# Altium PCB PCB_TEST_ADAPTER.PcbDoc (part 1 of 2)
Units mil, origin at the board's own origin, x right, y up, seen from the top; angles counter-clockwise.
Board outline 9448.82 x 5511.81 mil, 4 copper layers (Top Layer, Internal Plane 1, Internal Plane 2, Bottom Layer), stack 30.635 mil thick; 309 components, 242 nets, 1237 pads, 252 vias.
Unrouted connection lines stored in the file: 662.
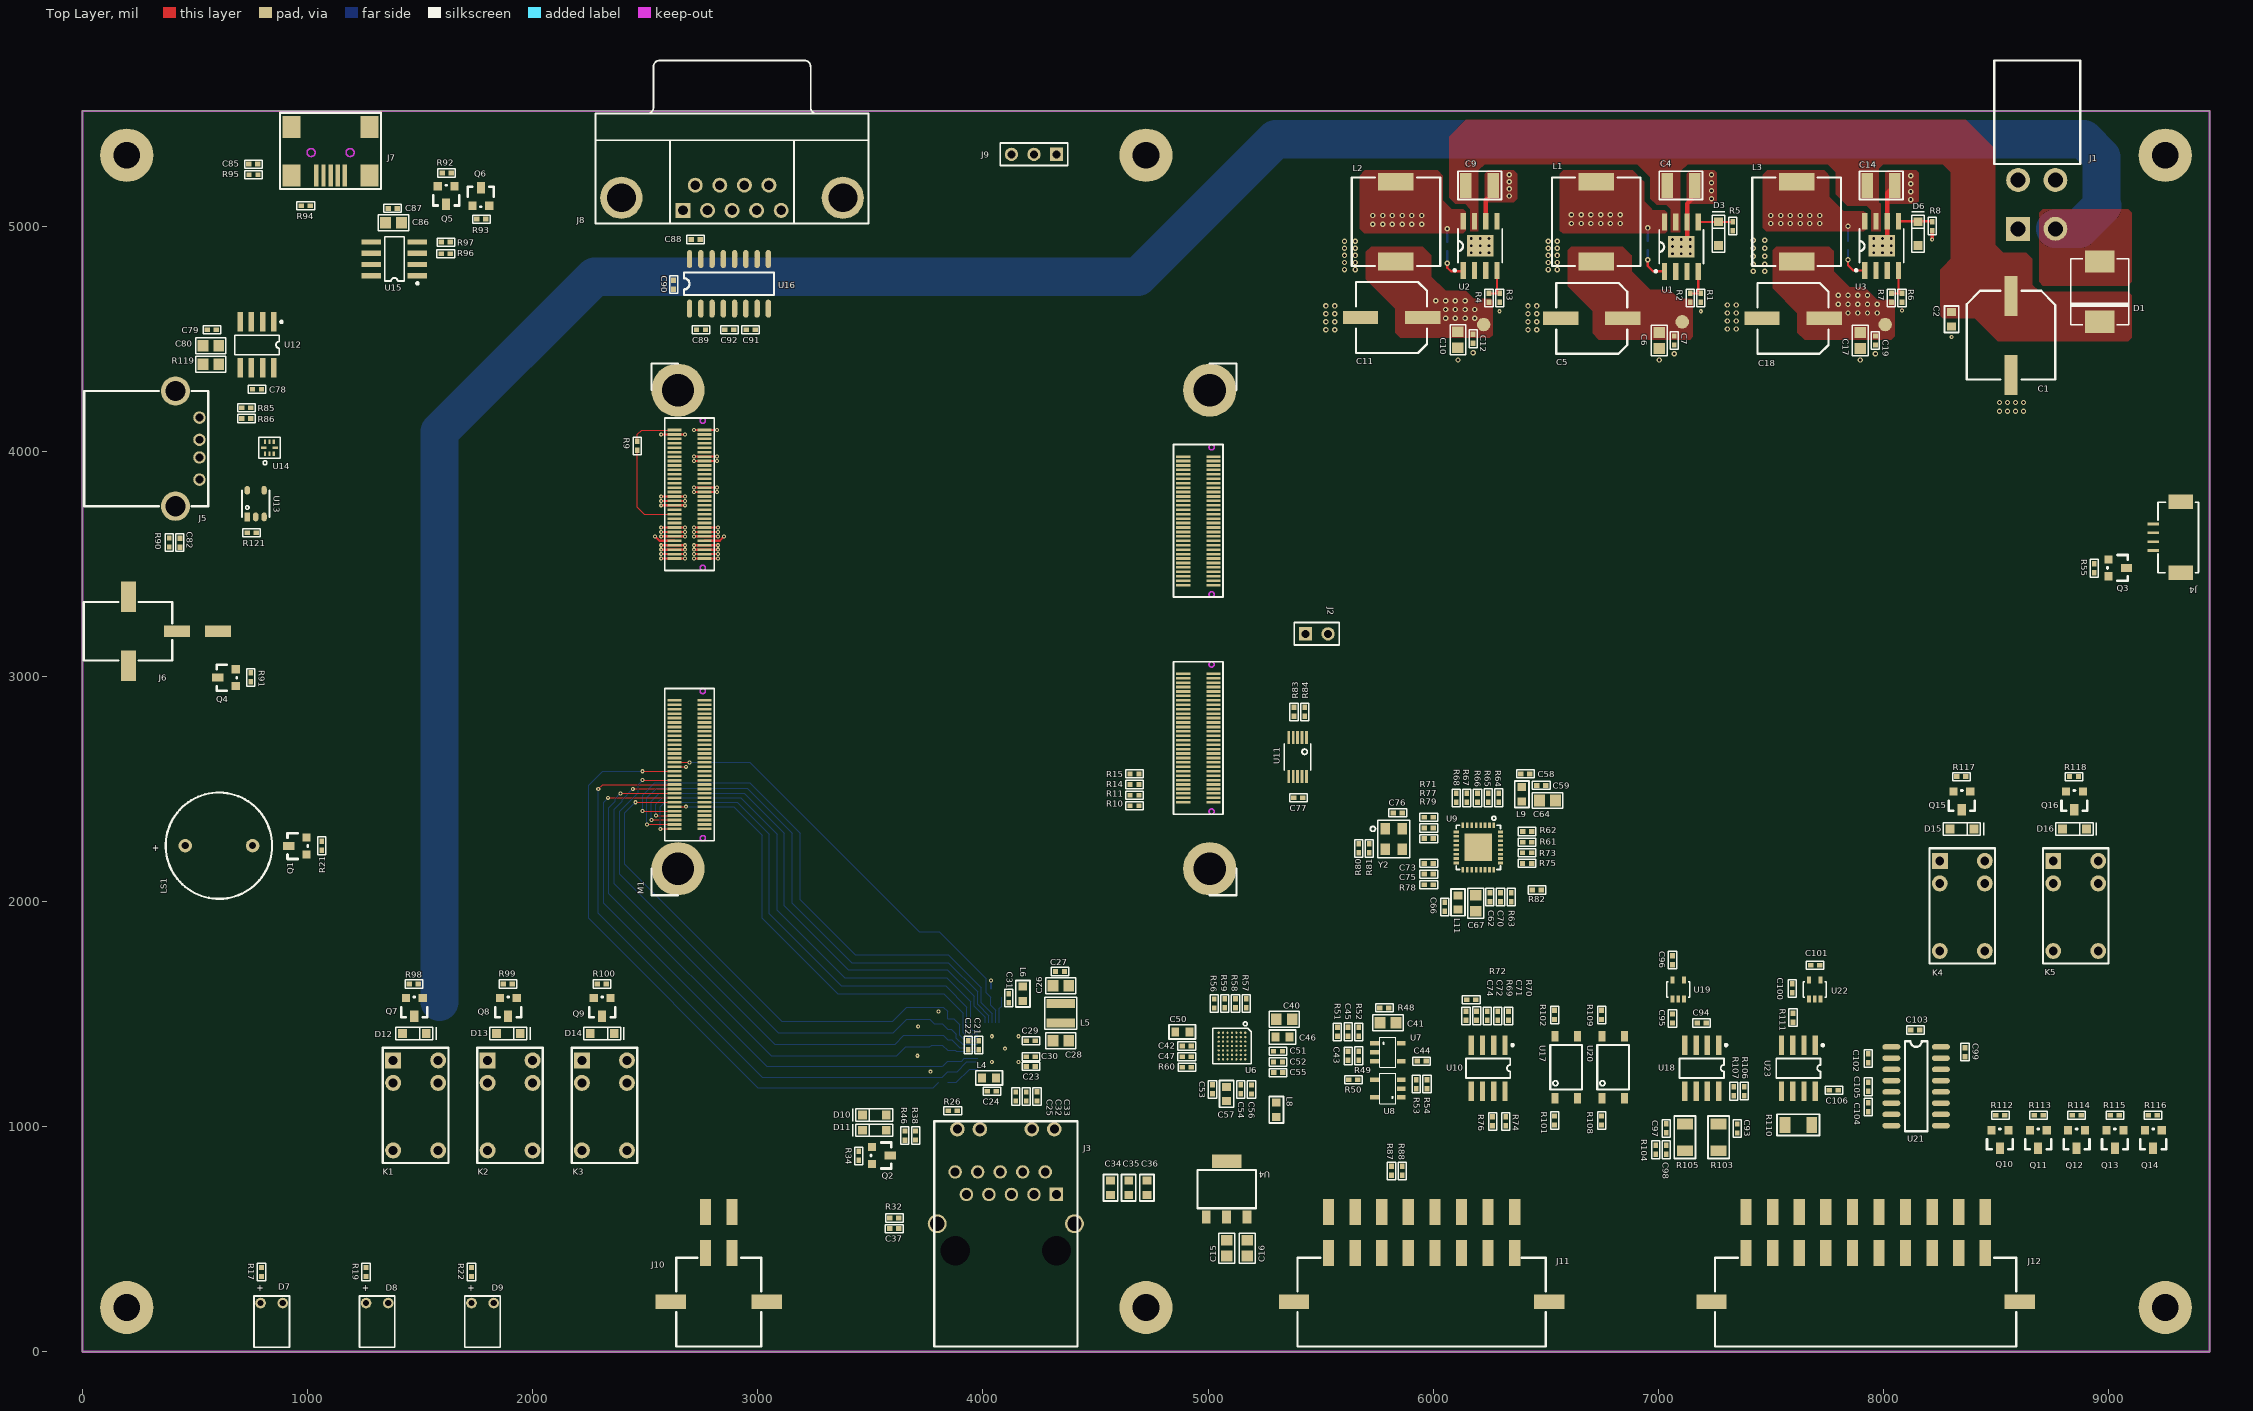
[diagram p0: Top Layer view]
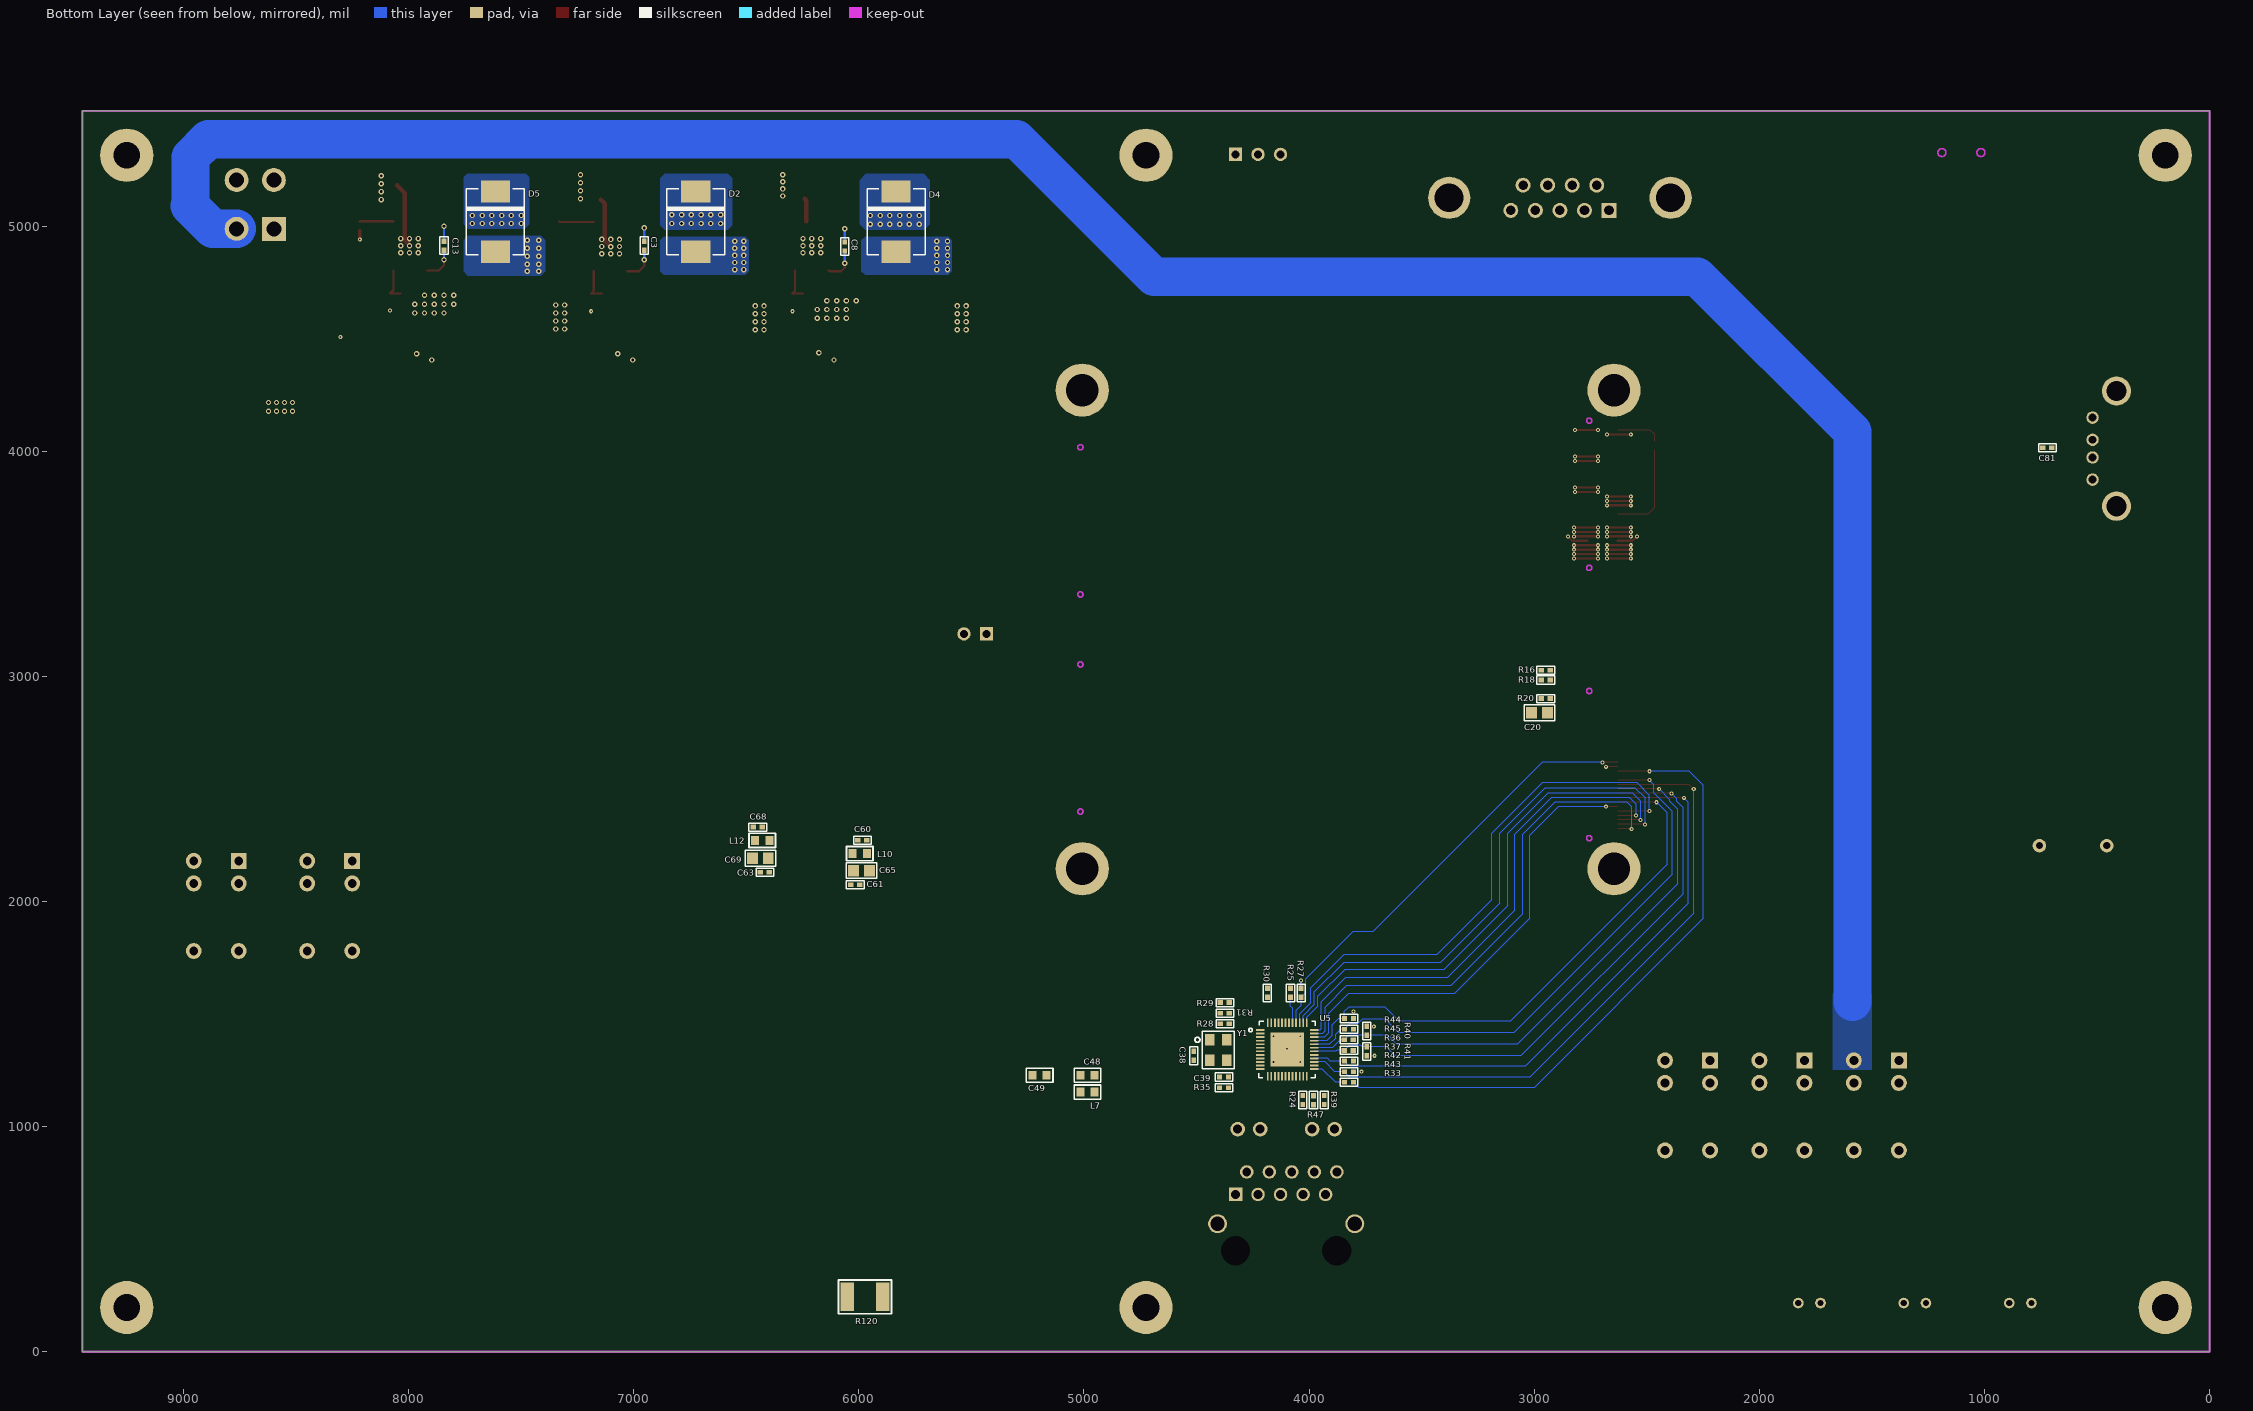
[diagram p1: Bottom Layer view, seen from below]
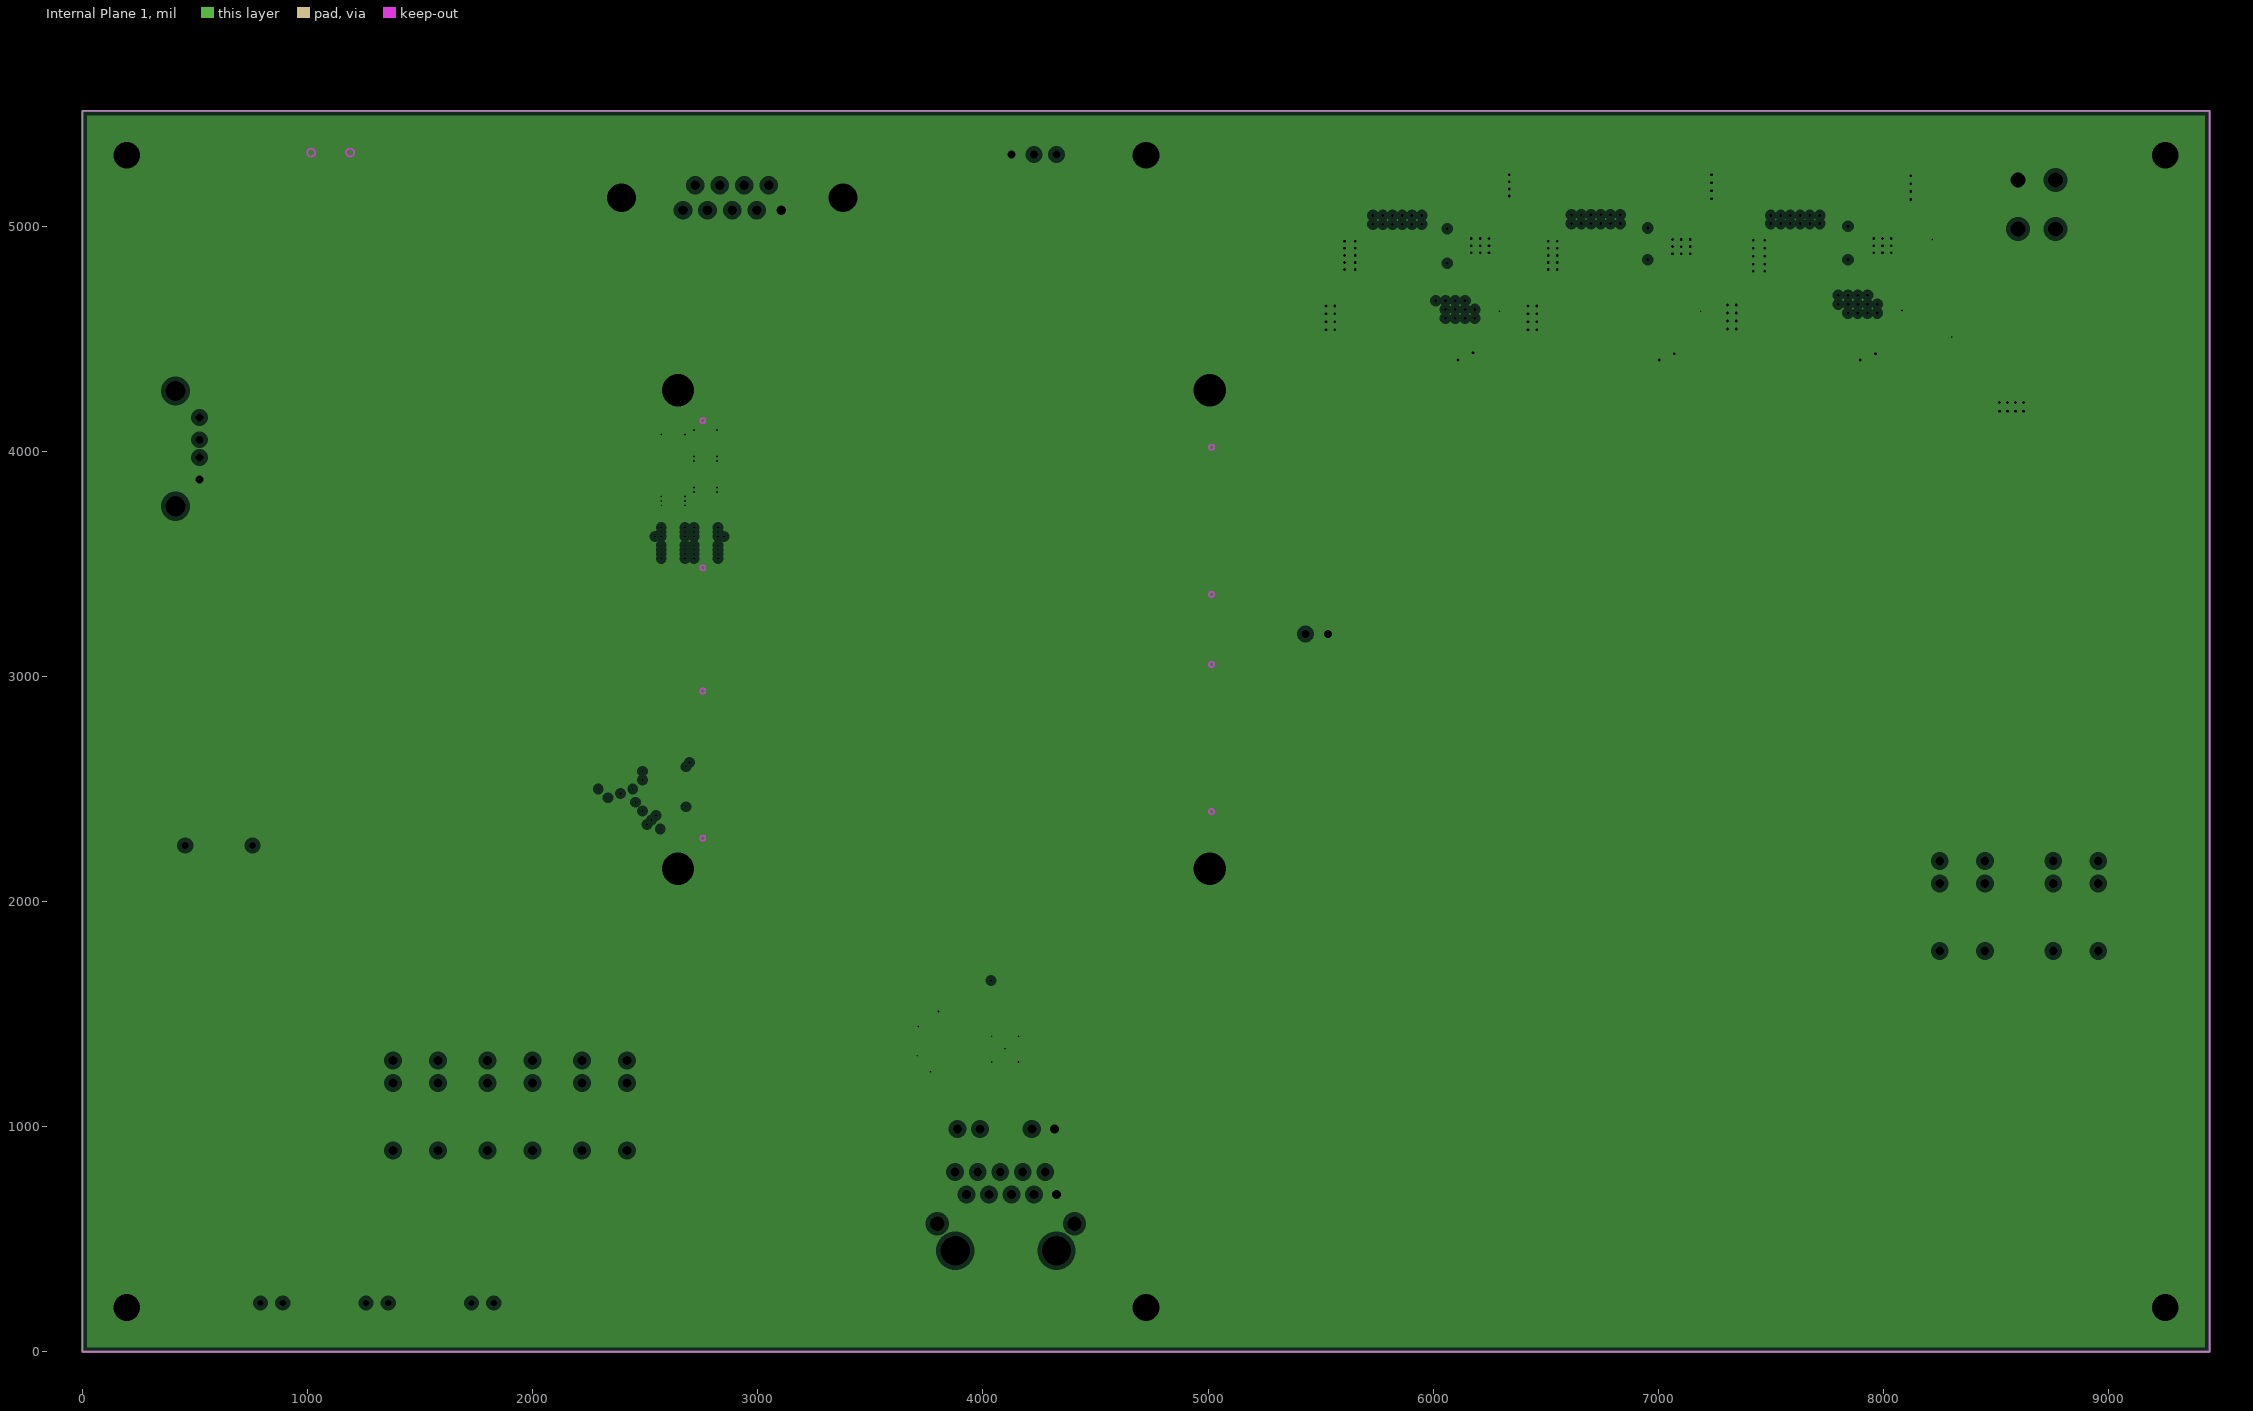
[diagram p2: Internal Plane 1, clearances drawn from the general rule]
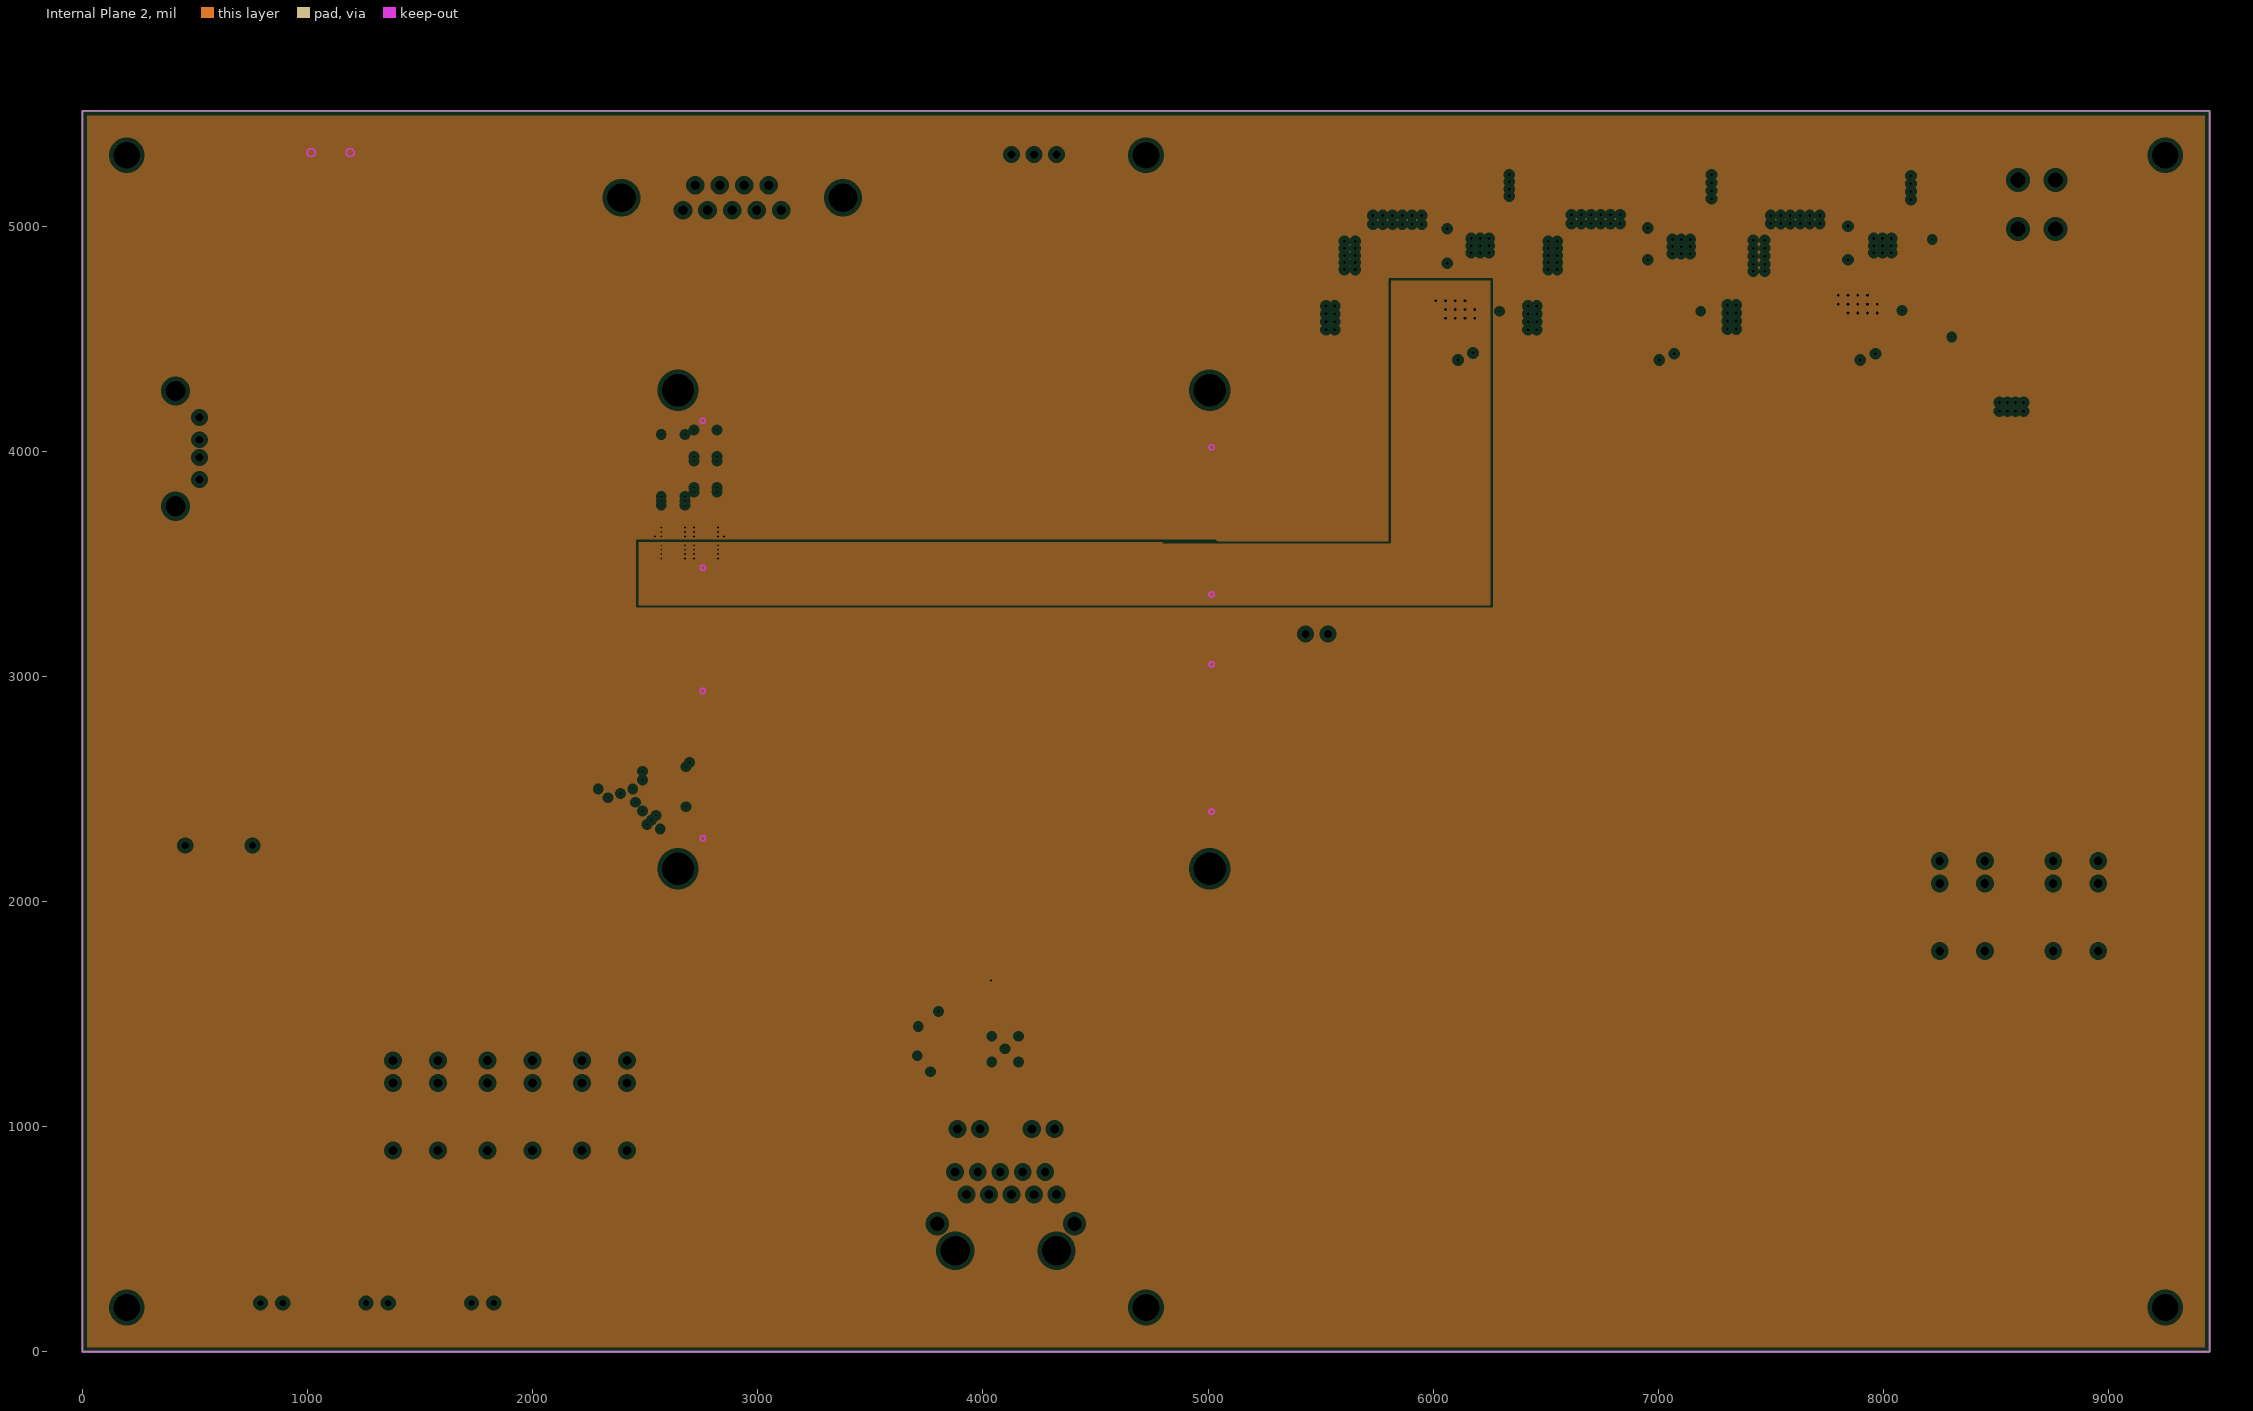
[diagram p3: Internal Plane 2, clearances drawn from the general rule]

## Layer stack, top to bottom
Top Solder: solder mask 0.4, Solder Resist, Dk 3.5
Top Layer: signal copper 1.4
Dielectric 1: core 10, FR-4, Dk 4.2
Internal Plane 1: plane copper 1.4173, net GND
Dielectric 3: prepreg 5, Dk 4.2
Internal Plane 2: plane copper 1.4173, net (Multiple Nets)
Dielectric 2: core 10, Dk 4.2
Bottom Layer: signal copper 1.4
Bottom Solder: solder mask 0.4, Solder Resist, Dk 3.5

## Board outline
0,0 9448.82,0 9448.82,5511.81 0,5511.81

## Design rules (kind name [scope] priority, off if disabled: settings)
Clearance [All] p1: gap=5
ComponentClearance [All] p1: gap=0 collisioncheckmode=3 verticalgap=0 showdistances=FALSE
DiffPairsRouting DiffPairsRouting_2 [InDifferentialPairClass('CAN')] p1: maxlimit=10 minlimit=10 mostfreqgap=10 toplayer_minwidth=10 toplayer_maxwidth=10 toplayer_prefwidth=10 bottomlayer_minwidth=10 bottomlayer_maxwidth=10 bottomlayer_prefwidth=10 maxuncoupledlength=500
DiffPairsRouting DiffPairsRouting_1 [InDifferentialPairClass('RGMII')] p2: maxlimit=5.2 minlimit=5.2 mostfreqgap=5.2 toplayer_minwidth=3.8 toplayer_maxwidth=3.8 toplayer_prefwidth=3.8 bottomlayer_minwidth=3.8 bottomlayer_maxwidth=3.8 bottomlayer_prefwidth=3.8 maxuncoupledlength=500
DiffPairsRouting [InDifferentialPairClass('USB')] p3: maxlimit=3.7 minlimit=3.7 mostfreqgap=3.7 toplayer_minwidth=5.3 toplayer_maxwidth=5.3 toplayer_prefwidth=5.3 bottomlayer_minwidth=5.3 bottomlayer_maxwidth=5.3 bottomlayer_prefwidth=5.3 maxuncoupledlength=500
PlaneClearance PlaneClearance_2 [InPadClass('MT')] p1: clearance=50
PlaneClearance PlaneClearance_1 [(InComponent('K1') OR InComponent('K2') OR InComponent('K3') OR InComponent('K4') OR InComponent('K5') OR InComponent('J1'))] p2: clearance=50
PlaneClearance [All] p3: clearance=20
PlaneConnect PlaneConnect_2 [IsVia] p1: planeconnectstyle=Direct reliefexpansion=20 reliefentries=4 reliefconductorwidth=10 reliefairgap=10
PlaneConnect PlaneConnect_1 [InComponent('J1')] p2: planeconnectstyle=Relief reliefexpansion=25 reliefentries=4 reliefconductorwidth=25 reliefairgap=15
PlaneConnect [All] p3: planeconnectstyle=Relief reliefexpansion=20 reliefentries=4 reliefconductorwidth=10 reliefairgap=10
PolygonConnect [All] p1: connectstyle=Direct reliefconductorwidth=10 reliefentries=4 polygonreliefangle="90 Angle" airgapwidth=10
RoutingVias [All] p1: holewidth=8 width=18 viastyle="Through Hole" minholewidth=8 minwidth=18 maxholewidth=20 maxwidth=40
SolderMaskExpansion [All] p1: expansion=4
Width [All] p1: maxlimit=200 minlimit=3 preferedwidth=4.7 minimp=50.000000 maximp=50.000000 favimp=50.000000
26 further rules are at their usual default settings.

## Classes and differential pairs
net class RGMII_TX: RGMII-TXCLK RGMII-TXD0 RGMII-TXD1 RGMII-TXD2 RGMII-TXD3 RGMII-TXEN
net class RGMII_RX: RGMII-RXCLK RGMII-RXD0 RGMII-RXD1 RGMII-RXD2 RGMII-RXD3 RGMII-RXDV
pad class MT: Free-MT1 Free-MT2 Free-MT3 Free-MT4 Free-MT5 Free-MT6 M1-MT7 M1-MT8 M1-MT9 M1-MT10
differential pair class RGMII: RGMII-TRX0 RGMII-TRX1 RGMII-TRX2 RGMII-TRX3
differential pair class CAN: CAN RS485
differential pair class USB: OTG USB-HOST USBHC
component class 01-POWER: C1 C2 C3 C4 C5 C6 C7 C8 C9 C10 C11 C12 C13 C14 C15 C16 C17 C18 C19 D1 D2 D3 D4 D5 D6 J1 L1 L2 L3 R1 R2 R3 R4 R5 R6 R7 R8 R9 U1 U2 U3 U4
component class 02-CPU_BOARD: C20 D7 D8 D9 J2 LS1 M1 Q1 R10 R11 R14 R15 R16 R17 R18 R19 R20 R21 R22
component class 03-ETHERNET: C21 C22 C23 C24 C25 C26 C27 C28 C29 C30 C31 C32 C33 C34 C35 C36 C37 C38 C39 D10 D11 J3 L4 L5 L6 Q2 R24 R25 R26 R27 R28 R29 R30 R31 R32 R33 R34 R35 R36 R37 R38 R39 R40 R41 R42 R43 R44 R45 R46 R47 U5 Y1
component class 04-AUDIO_TEST: C40 C41 C42 C43 C44 C45 C46 C47 C48 C49 C50 C51 C52 C53 C54 C55 C56 C57 J4 L7 L8 Q3 R48 R49 R50 R51 R52 R53 R54 R55 R56 R57 R58 R59 R60 U6 U7 U8
component class 05-VIDEO_TEST_PATTERN: C58 C59 C60 C61 C62 C63 C64 C65 C66 C67 C68 C69 C70 C71 C72 C73 C74 C75 C76 L9 L10 L11 L12 R61 R62 R63 R64 R65 R66 R67 R68 R69 R70 R71 R72 R73 R74 R75 R76 R77 R78 R79 R80 R81 R82 U9 U10 Y2
component class 06-VOLTAGE_DETECTION: C77 R83 R84 R85 R86 R87 R88 U11
component class 07-USB_HOST: C78 C79 C80 C81 C82 J5 J6 Q4 R90 R91 R119 R121 U12 U13 U14
component class 08-USB_OTG: C85 C86 C87 J7 Q5 Q6 R92 R93 R94 R95 R96 R97 U15
component class 09-UART: C88 C89 C90 C91 C92 J8 J9 U16
component class 10-TEST_PORT: C93 C94 C95 C96 C97 C98 C99 C100 C101 C102 C103 C104 C105 C106 D12 D13 D14 D15 D16 J10 J11 J12 K1 K2 K3 K4 K5 Q7 Q8 Q9 Q10 Q11 Q12 Q13 Q14 Q15 Q16 R98 R99 R100 R101 R102 R103 R104 R105 R106 R107 R108 R109 R110 R111 R112 R113 R114 R115 R116 R117 R118 R120 U17 U18 U19 U20 U21 U22 U23
differential pair CAN: +CAN_P -CAN_N
differential pair OTG: +OTG_P -OTG_N
differential pair RGMII-TRX0: +RGMII-TRX0_P -RGMII-TRX0_N
differential pair RGMII-TRX1: +RGMII-TRX1_P -RGMII-TRX1_N
differential pair RGMII-TRX2: +RGMII-TRX2_P -RGMII-TRX2_N
differential pair RGMII-TRX3: +RGMII-TRX3_P -RGMII-TRX3_N
differential pair RS485: +RS485_P -RS485_N
differential pair USB-HOST: +USB-HOST_P -USB-HOST_N
differential pair USBHC: +USBHC_P -USBHC_N

## Components (designator, comment, footprint, x,y, rotation, side; value= is the part's Value field where it differs from the comment)
C1 "220uF/50V" DL-10*10.5 8566.93,4515.75 r0 top
C2 "0.22uF/50V" 0603 8303.15,4586.61 r0 top
C3 "0.01uF/50V" 0402 6952.76,4913.39 r90 bottom
C4 "10uF/50V" 1210 7039.37,5181.1 r0 top
C5 "220uF/25V" DL-8*10.5 6704.72,4590.55 r270 top
C6 "4.7uF/25V" 0805 7003.94,4456.69 r90 top
C7 "0.22uF/10V" 0402 7070.87,4492.13 r270 top
C8 "0.01uF/50V" 0402 6062.99,4909.45 r90 bottom
C9 "10uF/50V" 1210 6145.67,5181.1 r0 top
C10 "4.7uF/25V" 0805 6110.24,4460.63 r90 top
C11 "220uF/25V" DL-8*10.5 5814.96,4594.49 r270 top
C12 "0.22uF/10V" 0402 6177.17,4500 r270 top
C13 "0.01uF/50V" 0402 7842.52,4913.39 r90 bottom
C14 "10uF/50V" 1210 7929.13,5181.1 r0 top
C15 "10uF/10V" 0805 5082.68,496.06 r270 top
C16 "10uF/10V" 0805 5173.23,496.06 r270 top
C17 "4.7uF/25V" 0805 7897.64,4456.69 r90 top
C18 "220uF/25V" DL-8*10.5 7598.43,4590.55 r270 top
C19 "0.22uF/10V" 0402 7964.57,4492.13 r270 top
C20 "4.7uF/25V" 0805 2940.94,2838.58 r0 bottom
C21 "1uF/10V" 0402 3982,1362.2 r270 top
C22 "0.1uF/50V" 0402 3934.76,1362.2 r270 top
C23 "1uF/10V" 0402 4212.6,1267.72 r0 top
C24 "1uF/10V" 0402 4039.37,1157.48 r0 top
C25 "0.1uF/50V" 0402 4145.67,1133.86 r90 top
C26 "10uF/10V" 0805 4311.02,1625.98 r0 top
C27 "0.1uF/50V" 0402 4342.52,1688.98 r180 top
C28 "10uF/10V" 0805 4311.02,1381.89 r0 top
C29 "0.1uF/50V" 0402 4212.6,1381.89 r0 top
C30 "0.1uF/50V" 0402 4212.6,1311.02 r0 top
C31 "0.1uF/50V" 0402 4114.17,1570.87 r270 top
C32 "0.1uF/50V" 0402 4192.91,1133.86 r90 top
C33 "0.1uF/50V" 0402 4240.16,1134.05 r90 top
C34 "0.1uF(DNP)" 0603 4566.93,728.35 r0 top
C35 "0.1uF(DNP)" 0603 4647.64,728.35 r0 top
C36 "0.1uF(DNP)" 0603 4728.35,728.35 r0 top
C37 "0.1uF/50V" 0402 3606.3,547.24 r180 top
C38 "22pF/50V" 0402 4511.81,1314.96 r90 bottom
C39 "22pF/50V" 0402 4377.95,1220.47 r180 bottom
C40 "10uF/10V" 0805 5374.02,1476.39 r180 top
C41 "10uF/10V" 0805 5763.78,1460.64 r0 top
C42 "0.1uF/50V" 0402 4905.52,1358.28 r180 top
C43 "1uF/10V" 0402 5622.05,1314.97 r270 top
C44 "1uF/10V" 0402 5948.82,1291.34 r0 top
C45 "0.1uF/50V" 0402 5622.05,1421.45 r90 top
C46 "4.7uF/6.3V" 0603 5330.71,1397.65 r270 top
C47 "0.1uF/50V" 0402 4905.52,1311.03 r180 top
C48 "4.7uF/6.3V" 0603 4984.25,1228.35 r270 bottom
C49 "4.7uF/6.3V" 0603 5196.85,1228.35 r90 bottom
C50 "4.7uF/6.3V" 0603 4885.83,1421.26 r90 top
C51 "1uF/10V" 0402 5311.03,1334.66 r180 top
C52 "1uF/10V" 0402 5311.03,1287.41 r180 top
C53 "1uF/10V" 0402 5019.69,1165.36 r90 top
C54 "2.2uF/6.3V" 0402 5145.67,1165.36 r90 top
C55 "2.2uF/6.3V" 0402 5311.03,1240.17 r0 top
C56 "2.2uF/6.3V" 0402 5192.92,1165.36 r270 top
C57 "4.7uF/6.3V" 0603 5082.68,1145.68 r180 top
C58 "0.1uF/50V" 0402 6409.45,2566.93 r180 top
C59 "0.1uF/50V" 0402 6480.31,2515.75 r180 top
C60 "0.1uF/50V" 0402 5984.25,2271.65 r180 bottom
C61 "0.1uF/50V" 0402 6015.75,2074.8 r0 bottom
C62 "0.1uF/50V" 0402 6251.97,2019.68 r90 top
C63 "0.1uF/50V" 0402 6417.32,2129.92 r180 bottom
C64 "10uF/10V" 0805 6472.44,2448.82 r0 top
C65 "10uF/10V" 0805 6023.62,2137.8 r180 bottom
C66 "0.1uF/50V" 0402 6051.18,1976.38 r270 top
C67 "10uF/10V" 0805 6188.98,2027.56 r270 top
C68 "0.1uF/50V" 0402 6448.82,2330.71 r0 bottom
C69 "10uF/10V" 0805 6401.57,2192.91 r0 bottom
C70 "2200pF/50V" 0402 6299.21,2019.68 r270 top
C71 "0.1uF/50V" 0402 6287.4,1492.13 r90 top
C72 "0.1uF/50V" 0402 6192.91,1492.57 r90 top
C73 "0.01uF/50V" 0402 5980.31,2169.29 r0 top
C74 "0.1uF/50V" 0402 6145.67,1492.57 r270 top
C75 "0.1uF/50V" 0402 5980.31,2122.05 r0 top
C76 "0.1uF/50V" 0402 5842.52,2393.7 r0 top
C77 "0.1uF/50V" 0402 5401.57,2460.63 r180 top
C78 "0.1uF/50V" 0402 775.59,4275.59 r0 top
C79 "0.1uF/50V" 0402 574.8,4539.37 r0 top
C80 "10uF/10V" 0805 606.3,4468.5 r180 top
C81 "0.1uF/50V" 0402 720.47,4015.75 r0 bottom
C82 "0.1uF/50V" 0402 433.07,3594.49 r270 top
C85 "0.1uF/50V" 0402 759.84,5275.59 r180 top
C86 "10uF/10V" 0805 1346.46,5015.75 r0 top
C87 "0.1uF/50V" 0402 1377.95,5078.74 r180 top
C88 "0.1uF/50V" 0402 2724.41,4940.94 r180 top
C89 "0.1uF/50V" 0402 2748.03,4539.37 r180 top
C90 "0.1uF/50V" 0402 2625.98,4740.16 r270 top
C91 "0.1uF/50V" 0402 2968.5,4539.37 r180 top
C92 "0.1uF/50V" 0402 2874.02,4539.37 r180 top
C93 "56pF/50V" 0402 7350.39,992.13 r270 top
C94 "0.1uF/50V" 0402 7192.91,1460.63 r180 top
C95 "0.1uF/50V" 0402 7062.99,1480.32 r90 top
C96 "0.1uF/50V" 0402 7062.99,1740.16 r270 top
C97 "56pF/50V" 0402 7035.43,992.13 r90 top
C98 "1000pF(DNP)" 0402 7035.43,897.64 r270 top
C99 "0.1uF/50V" 0402 8362.2,1330.71 r90 top
C100 "0.1uF/50V" 0402 7594.49,1614.17 r270 top
C101 "0.1uF/50V" 0402 7696.85,1716.54 r180 top
C102 "0.1uF/50V" 0402 7933.07,1303.15 r90 top
C103 "0.1uF/50V" 0402 8141.73,1429.13 r180 top
C104 "0.1uF/50V" 0402 7933.07,1086.61 r90 top
C105 "0.1uF/50V" 0402 7933.07,1177.17 r90 top
C106 "0.1uF/50V" 0402 7779.53,1161.42 r0 top
D1 "MBRS360T3G" SMC 8960.63,4842.52 r90 top
D2 "MBRS360T3G" SMC 6724.41,4885.83 r270 bottom
D3 "1N5819HW" 1N5819 7267.72,5019.69 r270 top
D4 "MBRS360T3G" SMC 5834.65,4885.83 r270 bottom
D5 "MBRS360T3G" SMC 7614.17,4885.83 r270 bottom
D6 "1N5819HW" 1N5819 8153.54,5019.69 r270 top
D7 "RED" LED-3MM 889.76,216.54 r180 top locked
D8 "GREEN" LED-3MM 1358.27,216.54 r180 top locked
D9 "RED" LED-3MM 1826.77,216.54 r180 top locked
D10 "1N5819HW" 1N5819 3464.57,1051.18 r0 top
D11 "1N5819HW" 1N5819 3464.57,984.25 r0 top
D12 "1N5819HW" 1N5819 1527.56,1413.39 r180 top
D13 "1N5819HW" 1N5819 1944.88,1413.39 r180 top
D14 "1N5819HW" 1N5819 2362.2,1413.39 r180 top
D15 "1N5819HW" 1N5819 8401.57,2322.83 r180 top
D16 "1N5819HW" 1N5819 8901.57,2322.83 r180 top
J1 "POWER IN" 5557-4PIN 8598.43,4988.19 r90 top locked
J2 "BOOT MODE" HDR1X2 5433.07,3188.98 r0 top
J3 "SI-51005-F" SI-51005-F 4326.77,448.82 r0 top locked
J4 "MIC & RST-PB" FPC1.0-DR-SMD-4P-F2.0 9259.84,3618.11 r270 top
J5 "USB HOST" USB-HOST 519.68,3874.02 r270 top locked
J6 "OTG ID TEST" 3030WR-S-2*1P 602.36,3200.79 r270 top locked
J7 "USB OTG" MINIUSB-TYPEAB 1102.36,5224.41 r0 top locked
J8 "RS232 COM" DB9-F 2885.83,5500 r0 top locked
J9 "DEBUG UART" HDR1X3 4326.77,5318.9 r180 top
J10 "POWER TEST" 3030WR-S-2*2P 2826.77,421.26 r0 top locked
J11 "IO1 TEST PORT" 3030WR-S-2*8P 5948.82,421.26 r0 top locked
J12 "Header 10X2" 3030WR-S-2*10P 7921.26,421.26 r0 top locked
K1 "G5V-1" G5V-1 1480.32,1094.49 r0 top
K2 "G5V-1" G5V-1 1899.61,1094.49 r0 top
K3 "G5V-1" G5V-1 2318.9,1094.49 r0 top
K4 "G5V-1" G5V-1 8350.39,1980.31 r0 top
K5 "G5V-1" G5V-1 8854.33,1980.32 r0 top
L1 "8.2uH/3A" IND_10X10 6724.41,5019.69 r0 top
L2 "8.2uH/3A" IND_10X10 5834.65,5019.68 r0 top
L3 "8.2uH/3A" IND_10X10 7614.17,5019.68 r0 top
L4 "120ohm/100MHz 1A" 0603 4027.56,1216.54 r90 top
L5 "4.7uH/1A" IND-4.7UH-1A 4346.46,1460.63 r0 top
L6 "120ohm/100MHz 1A" 0603 4177.17,1590.55 r0 top
L7 "120ohm/100MHz 1A" 0603 4984.25,1153.54 r270 bottom
L8 "120ohm/100MHz 1A" 0603 5303.15,1074.8 r180 top
L9 "120ohm/100MHz 1A" 0603 6393.7,2476.38 r0 top
L10 "120ohm/100MHz 1A" 0603 5996.06,2212.6 r270 bottom
L11 "120ohm/100MHz 1A" 0603 6110.24,1996.06 r180 top
L12 "120ohm/100MHz 1A" 0603 6429.13,2271.65 r90 bottom
LS1 "BELL" bell 606.3,2248.03 r0 top
M1 "IMX6Q-CPU-BOARD" IMX6-CPU-BOARD 5125.98,4389.76 r180 top locked
Q1 "BSS138P" NPN 996.06,2208.66 r90 top
Q2 "BSS138P" NPN 3507.87,909.45 r270 top
Q3 "BSS138P" NPN 9000,3519.69 r270 top
Q4 "BSS138P" NPN 681.1,2956.69 r90 top
Q5 "IRLML6402" MOSFET 1653.54,5177.17 r180 top
Q6 "BSS138P" NPN 1732.28,5090.55 r0 top
Q7 "BSS138P" NPN 1511.81,1570.87 r180 top
Q8 "BSS138P" NPN 1929.13,1570.87 r180 top
Q9 "BSS138P" NPN 2346.46,1570.87 r180 top
Q10 "BSS138P" NPN 8555.12,984.25 r180 top
Q11 "BSS138P" NPN 8725.39,984.25 r180 top
Q12 "BSS138P" NPN 8895.67,984.25 r180 top
Q13 "BSS138P" NPN 9065.94,984.25 r180 top
Q14 "BSS138P" NPN 9236.22,984.25 r180 top
Q15 "BSS138P" NPN 8385.83,2488.19 r180 top
Q16 "BSS138P" NPN 8885.83,2488.19 r180 top
R1 "1.1K/1%" 0402 7188.98,4681.1 r90 top
R2 "3.16K/1%" 0402 7141.73,4681.1 r90 top
R3 "1.1K/1%" 0402 6295.28,4681.1 r90 top
R4 "1.74K/1%" 0402 6248.03,4681.1 r90 top
R5 "10K" 0402 7330.71,5000 r90 top
R6 "1.1K/1%" 0402 8082.68,4681.1 r90 top
R7 "1.74K/1%" 0402 8035.43,4681.1 r90 top
R8 "10K" 0402 8216.54,5000 r90 top
R9 "0" 0402 2464.57,4023.62 r90 top
R10 "1.5K" 0402 4673.23,2425.2 r0 top
R11 "1.5K" 0402 4673.23,2472.44 r0 top
R14 "1.5K" 0402 4673.23,2519.68 r0 top
R15 "1.5K" 0402 4673.23,2566.93 r0 top
R16 "4.7K" 0402 2948.82,3027.56 r180 bottom
R17 "200" 0402 795.28,354.33 r90 top
R18 "0(DNP)" 0402 2948.82,2984.25 r180 bottom
R19 "200" 0402 1259.84,354.33 r90 top
R20 "0" 0402 2948.82,2901.57 r180 bottom
R21 "2.2K" 0402 1062.99,2248.03 r270 top
R22 "200" 0402 1728.35,354.33 r90 top
R24 "270" 0402 4027.56,1118.11 r90 bottom
R25 "4.7K" 0402 4082.68,1594.49 r270 bottom
R26 "270" 0402 3866.14,1070.87 r180 top
R27 "10K" 0402 4035.43,1594.49 r270 bottom
R28 "10K" 0402 4374.02,1456.69 r180 bottom
R29 "10K(DNP)" 0402 4374.02,1551.18 r180 bottom
R30 "1.5K" 0402 4185.04,1594.49 r270 bottom
R31 "0" 0402 4374.02,1503.94 r180 bottom
R32 "100" 0402 3606.3,594.49 r0 top
R33 "22" 0402 3822.83,1196.85 r180 bottom
R34 "2.2K" 0402 3448.82,870.08 r270 top
R35 "2.37K/1%" 0402 4377.95,1173.23 r0 bottom
R36 "10K" 0402 3822.83,1385.83 r0 bottom
R37 "10K(DNP)" 0402 3822.83,1338.58 r0 bottom
R38 "10K(DNP)" 0402 3700.79,960.63 r90 top
R39 "10K(DNP)" 0402 3933.07,1118.11 r90 bottom
R40 "10K(DNP)" 0402 3744.09,1425.2 r90 bottom
R41 "10K" 0402 3744.09,1334.65 r270 bottom
R42 "10K" 0402 3822.83,1291.34 r180 bottom
R43 "10K" 0402 3822.83,1244.09 r180 bottom
R44 "10K" 0402 3822.83,1480.32 r180 bottom
R45 "10K" 0402 3822.83,1433.07 r180 bottom
R46 "10K" 0402 3653.54,960.63 r270 top
R47 "10K" 0402 3980.31,1118.11 r270 bottom
R48 "51" 0402 5783.46,1527.56 r180 top
R49 "100K" 0402 5669.29,1314.97 r90 top
R50 "10K" 0402 5645.67,1208.66 r0 top
R51 "10K" 0402 5574.81,1421.45 r270 top
R52 "20" 0402 5669.3,1421.45 r270 top
R53 "10K" 0402 5925.2,1188.98 r270 top
R54 "10K" 0402 5972.44,1188.98 r270 top
R55 "2.2K" 0402 8937.01,3480.31 r90 top
R56 "22" 0402 5027.56,1547.25 r270 top
R57 "0" 0402 5169.3,1547.69 r270 top
R58 "0" 0402 5122.05,1547.69 r270 top
R59 "0" 0402 5074.81,1547.69 r270 top
R60 "22" 0402 4905.52,1263.79 r0 top
R61 "10K" 0402 6417.32,2263.78 r180 top
R62 "10K" 0402 6417.32,2311.02 r180 top
R63 "510" 0402 6346.46,2019.68 r90 top
R64 "10K" 0402 6291.34,2461.07 r270 top
R65 "10K" 0402 6244.09,2461.07 r270 top
R66 "10K" 0402 6196.85,2460.63 r270 top
R67 "10K" 0402 6149.61,2460.63 r270 top
R68 "10K" 0402 6102.36,2460.63 r270 top
R69 "3M" 0402 6240.16,1492.57 r270 top
R70 "3M" 0402 6334.65,1492.13 r270 top
R71 "10K" 0402 5980.31,2374.02 r0 top
R72 "75" 0402 6169.29,1563.43 r180 top
R73 "10K" 0402 6417.13,2216.54 r180 top
R74 "75" 0402 6322.83,1023.18 r90 top
R75 "10K" 0402 6417.13,2169.29 r180 top
R76 "75" 0402 6263.78,1023.18 r90 top
R77 "0" 0402 5980.31,2326.77 r0 top
R78 "169/1%" 0402 5980.31,2074.8 r0 top
R79 "DNP" 0402 5980.31,2279.53 r0 top
R80 "0" 0402 5669.29,2236.66 r270 top
R81 "DNP" 0402 5716.54,2236.66 r270 top
R82 "0" 0402 6460.63,2051.18 r180 top
R83 "DNP" 0402 5381.89,2842.52 r270 top
R84 "0" 0402 5429.13,2842.52 r270 top
R85 "2.32K/1%" 0402 728.35,4192.91 r0 top
R86 "1K/1%" 0402 728.35,4145.67 r180 top
R87 "6.98K/1%" 0402 5814.96,803.15 r90 top
R88 "1K/1%" 0402 5862.2,803.15 r90 top
R90 "100" 0402 385.83,3594.49 r90 top
R91 "2.2K" 0402 748.03,2996.06 r270 top
R92 "47K" 0402 1618.11,5236.22 r0 top
R93 "47K" 0402 1771.65,5031.5 r0 top
R94 "100K(DNP)" 0402 992.13,5090.55 r180 top
R95 "100" 0402 759.84,5228.35 r0 top
R96 "100K(DNP)" 0402 1614.17,4877.95 r180 top
R97 "4.7K" 0402 1614.17,4929.13 r0 top
R98 "2.2K" 0402 1472.44,1633.86 r0 top
R99 "2.2K" 0402 1889.76,1633.86 r0 top
R100 "2.2K" 0402 2307.09,1633.86 r0 top
R101 "200" 0402 6539.37,1027.56 r270 top
R102 "47K" 0402 6539.37,1496.06 r90 top
R103 "62/(1/4W)(DNP)" 1206 7267.72,1011.81 r270 top
R104 "0(DNP)" 0402 6988.19,897.64 r270 top
R105 "62(1/4W)(DNP)" 1206 7118.11,893.7 r90 top
R106 "0(DNP)" 0402 7381.89,1157.48 r90 top
R107 "0" 0402 7334.65,1157.48 r270 top
R108 "200" 0402 6748.03,1027.56 r270 top
R109 "47K" 0402 6748.03,1496.06 r90 top
R110 "120(1/4W)(DNP)" 1206 7681.1,1007.87 r180 top
R111 "1K" 0402 7598.43,1484.25 r270 top
R112 "2.2K" 0402 8519.68,1051.18 r0 top
R113 "2.2K" 0402 8688.98,1051.18 r0 top
R114 "2.2K" 0402 8858.27,1051.18 r0 top
R115 "2.2K" 0402 9027.56,1051.18 r0 top
R116 "2.2K" 0402 9196.85,1051.18 r0 top
R117 "2.2K" 0402 8346.46,2555.12 r0 top
R118 "2.2K" 0402 8846.46,2555.12 r0 top
R119 "510(1/10W)" 0805 606.3,4385.83 r180 top
R120 "510/(1/2W)" 1812 5893.7,244.09 r0 bottom
R121 "10K" 0402 751.97,3637.8 r180 top
U1 "LM22676MR-ADJ" PSO8 7027.56,4799.21 r0 top
U2 "LM22676MR-ADJ" PSO8 6133.86,4803.15 r0 top
U3 "LM22676MR-ADJ" PSO8 7917.32,4803.15 r0 top
U4 "LM1117MPX-1.8" AMS1117 5082.68,598.43 r0 top
U5 "AR8031" QFN48 4216.54,1429.13 r270 bottom
U6 "WM8962ECS" BGA49 5165.36,1417.33 r270 top
U7 "LM7321MF" SOT23-5 5740.16,1370.08 r270 top
U8 "LM7321MF" SOT23-5 5858.27,1129.93 r90 top
U9 "ADV7390BCPZ" LFCSP32 6200.79,2240.16 r270 top
U10 "THS7314" so8 6244.09,1259.84 r180 top
U11 "ADS1015IDGS" VSSOP10 5397.64,2641.73 r180 top
U12 "MIC2026-1YM" SO8 775.59,4472.44 r180 top
U13 "74HC1G04" SOT753 732.28,3708.66 r90 top
U14 "TS3USB31RSER" UQFN8 830.71,4015.75 r90 top
U15 "MIC2026-1YM" SO8 1385.83,4854.33 r90 top
U16 "MAX3232E" SO-16 2696.85,4633.86 r0 top
U17 "TLP127" TLP127 6590.55,1263.78 r0 top
U18 "TJA1040T" SO8 7192.91,1259.84 r180 top
U19 "NLSV1T34DFT2G" SC70 7062.99,1566.93 r0 top
U20 "TLP127" TLP127 6799.21,1263.78 r0 top
U21 "MAX3232E" SO-16 8035.43,1354.33 r270 top
U22 "NLSV1T34DFT2G" SC70 7669.29,1566.93 r0 top
U23 "MAX485ESA" SO8 7622.05,1259.84 r180 top
Y1 "25MHZ" XTAL4_SX_3225 4440.94,1385.83 r270 bottom
Y2 "27MHz" XTAL4_SX_3225 5787.4,2322.83 r270 top

## Footprints (in the part's own frame and the unit in brackets; to place one, negate y for a bottom-side part, rotate by r counter-clockwise, add the part's x,y. Pads: shape width x height; smd on the part's side, far side on the other; paste and mask are expansions set on the pad)
1N5819 [mm]
  rect 1x1 smd: 1(2.7,0) 2(0,0)
  silkscreen extent -1.1,-0.7 3.45,0.7
0402 [mil] "Chip Capacitor, Body 1.0x0.5mm, IPC High Density"
  rect 24x21 smd: 1(20.13,0) 2(-19.87,0)
  silkscreen extent -39,-18 39,18
0603 [mm]
  rect 1x0.9 smd: 1(0,0.8) 2(0,-0.8)
  silkscreen extent -0.8,-1.5 0.8,1.5
0805 [mm]
  rect 1.2x1.3 smd: 1(0,0) 2(1.8,0)
  silkscreen extent -0.8,-0.9 2.6,0.9
1206 [mm]
  rect 1.2x1.8 smd: 1(0,0) 2(3,0)
  silkscreen extent -0.9,-1.2 3.9,1.2
1210 [mm]
  rect 1.3x2.8 smd: 1(0,0) 2(3.1,0)
  silkscreen extent -0.9,-1.6 4,1.6
1812 [mm]
  rect 1.5x3.2 smd: 1(0,0) 2(4,0)
  silkscreen extent -1,-1.9 5,1.9
3030WR-S-2*1P [mm]
  rect 1.27x2.92 smd: 1(0,0) 2(0,-4.62)
  rect 3.43x1.65 smd: ""(-3.9,-10.1) ""(3.9,-10.1)
  silkscreen extent -3.3,-15.15 3.3,-5.15
3030WR-S-2*2P [mm]
  rect 1.27x2.92 smd: 1(-1.5,5.05) 2(-1.5,0.43) 3(1.5,5.05) 4(1.5,0.43)
  rect 3.43x1.65 smd: ""(-5.4,-5.05) ""(5.4,-5.05)
  silkscreen extent -4.8,-10.1 4.8,-0.1
3030WR-S-2*8P [mm]
  rect 1.27x2.92 smd: 1(-10.5,5.05) 2(-10.5,0.43) 3(-7.5,5.05) 4(-7.5,0.43) 5(-4.5,5.05) 6(-4.5,0.43) 7(-1.5,5.05) 8(-1.5,0.43) 9(1.5,5.05) 10(1.5,0.43) 11(4.5,5.05) 12(4.5,0.43) 13(7.5,5.05) 14(7.5,0.43) 15(10.5,5.05) 16(10.5,0.43)
  rect 3.43x1.65 smd: ""(-14.4,-5.05) ""(14.4,-5.05)
  silkscreen extent -14,-10.1 14,-0.1
3030WR-S-2*10P [mm]
  rect 1.27x2.92 smd: 1(-13.5,5.05) 2(-13.5,0.43) 3(-10.5,5.05) 4(-10.5,0.43) 5(-7.5,5.05) 6(-7.5,0.43) 7(-4.5,5.05) 8(-4.5,0.43) 9(-1.5,5.05) 10(-1.5,0.43) 11(1.5,5.05) 12(1.5,0.43) 13(4.5,5.05) 14(4.5,0.43) 15(7.5,5.05) 16(7.5,0.43) 17(10.5,5.05) 18(10.5,0.43) 19(13.5,5.05) 20(13.5,0.43)
  rect 3.43x1.65 smd: ""(-17.4,-5.05) ""(17.4,-5.05)
  silkscreen extent -17,-10.1 17,-0.1
5557-4PIN [mm]
  rect 2.7x2.7 hole 1.7: 1(0,0)
  round 2.7 hole 1.7: 2(5.5,0) 3(0,-4.2) 4(5.5,-4.2)
  silkscreen extent 7.3,-7 19,2.7
AMS1117 [mm]
  rect 1x1.5 smd: 1(-2.3,0) 2(0,0) 3(2.3,0)
  rect 3.3x1.5 smd: 4(0,6.3)
  silkscreen extent -3.3,1 3.3,5.3
bell [mil]
  round 60 hole 31.5: 1(-149.61,0) 2(149.61,0)
  silkscreen extent -236,-236 236,236
BGA49 [mil] "BGA49_0P5_3P62X4"
  round 10 smd: A1(0,0) A2(19.69,0) A3(39.37,0) A4(59.06,0) A5(78.75,0) A6(98.43,0) A7(118.12,0) B1(0,-19.69) B2(19.69,-19.69) B3(39.37,-19.69) B4(59.06,-19.69) B5(78.75,-19.69) B6(98.43,-19.69) B7(118.12,-19.69) C1(0,-39.37) C2(19.69,-39.37) C3(39.37,-39.37) C4(59.06,-39.37) C5(78.75,-39.37) C6(98.43,-39.37) C7(118.12,-39.37) D1(0,-59.06) D2(19.69,-59.06) D3(39.37,-59.06) D4(59.06,-59.06) D5(78.75,-59.06) D6(98.43,-59.06) D7(118.12,-59.06) E1(0,-78.75) E2(19.69,-78.75) E3(39.37,-78.75) E4(59.06,-78.75) E5(78.75,-78.75) E6(98.43,-78.75) E7(118.12,-78.75) F1(0,-98.43) F2(19.69,-98.43) F3(39.37,-98.43) F4(59.06,-98.43) F5(78.75,-98.43) F6(98.43,-98.43) F7(118.12,-98.43) G1(0,-118.12) G2(19.69,-118.12) G3(39.37,-118.12) G4(59.06,-118.12) G5(78.75,-118.12) G6(98.43,-118.12) G7(118.12,-118.12)
  silkscreen extent -48,-145 137,27
DB9-F [mm] "Connector; D Subminiature; 9 Position; Right Angle; Pitch 1.385 mm"
  rect 1.69x1.69 hole 1.09: 1(-5.54,-10.92)
  round 1.69 hole 1.09: 2(-2.77,-10.92) 3(0,-10.92) 4(2.77,-10.92) 5(5.54,-10.92) 6(-4.155,-8.08) 7(-1.385,-8.08) 8(1.385,-8.08) 9(4.155,-8.08)
  round 4.76 hole 3.26: 10(-12.495,-9.5) 11(12.495,-9.5)
  silkscreen extent -15.4,-12.4 15.4,6
DL-8*10.5 [mm]
  rect 1.5x4 smd: 1(0,3.5) 2(0,-3.5)
  silkscreen extent -4,-4 4,4
DL-10*10.5 [mm]
  rect 1.5x4.5 smd: 1(0,4.4) 2(0,-4.5)
  silkscreen extent -5,-5 5,5
FPC1.0-DR-SMD-4P-F2.0 [mm]
  rect 0.3x1.3 smd: 1(1.5,-1.54) 2(0.5,-1.54) 3(-0.5,-1.54) 4(-1.5,-1.54)
  rect 1.6x2.8 smd: ""(-4,1.54) ""(4,1.54)
  silkscreen extent -3.96,-1.03 4,3.54
G5V-1 [mm]
  rect 1.8x1.8 hole 1: 1(-2.54,5.08)
  round 1.8 hole 1: 2(-2.54,2.54) 5(-2.54,-5.08) 6(2.54,-5.08) 9(2.54,2.54) 10(2.54,5.08)
  silkscreen extent -3.7,-6.5 3.7,6.5
HDR1X2 [mm] "Connector; Header; 2 Position"
  rect 1.5x1.5 hole 0.9: 1(0,0)
  round 1.5 hole 0.9: 2(2.54,0)
  silkscreen extent -1.27,-1.27 3.81,1.27
HDR1X3 [mm] "Connector; Header; 3 Position"
  rect 1.5x1.5 hole 0.9: 1(0,0)
  round 1.5 hole 0.9: 2(2.54,0) 3(5.08,0)
  silkscreen extent -1.27,-1.27 6.35,1.27
IMX6-CPU-BOARD [mm]
  rect 1.6x0.3 smd: A1(2.6,49.5) A2(6,49.5) A3(2.6,49) A4(6,49) A5(2.6,48.5) A6(6,48.5) A7(2.6,48) A8(6,48) A9(2.6,47.5) A10(6,47.5) A11(2.6,47) A12(6,47) A13(2.6,46.5) A14(6,46.5) A15(2.6,46) A16(6,46) A17(2.6,45.5) A18(6,45.5) A19(2.6,45) A20(6,45) A21(2.6,44.5) A22(6,44.5) A23(2.6,44) A24(6,44) A25(2.6,43.5) A26(6,43.5) A27(2.6,43) A28(6,43) A29(2.6,42.5) A30(6,42.5) A31(2.6,42) A32(6,42) A33(2.6,41.5) A34(6,41.5) A35(2.6,41) A36(6,41) A37(2.6,40.5) A38(6,40.5) A39(2.6,40) A40(6,40) A41(2.6,39.5) A42(6,39.5) A43(2.6,39) A44(6,39) A45(2.6,38.5) A46(6,38.5) A47(2.6,38) A48(6,38) A49(2.6,37.5) A50(6,37.5) A51(2.6,37) A52(6,37) A53(2.6,36.5) A54(6,36.5) A55(2.6,36) A56(6,36) A57(2.6,35.5) A58(6,35.5) A59(2.6,35) A60(6,35) B1(2.6,25) B2(6,25) B3(2.6,24.5) B4(6,24.5) B5(2.6,24) B6(6,24) B7(2.6,23.5) B8(6,23.5) B9(2.6,23) B10(6,23) B11(2.6,22.5) B12(6,22.5) B13(2.6,22) B14(6,22) B15(2.6,21.5) B16(6,21.5) B17(2.6,21) B18(6,21) B19(2.6,20.5) B20(6,20.5) B21(2.6,20) B22(6,20) B23(2.6,19.5) B24(6,19.5) B25(2.6,19) B26(6,19) B27(2.6,18.5) B28(6,18.5) B29(2.6,18) B30(6,18) B31(2.6,17.5) B32(6,17.5) B33(2.6,17) B34(6,17) B35(2.6,16.5) B36(6,16.5) B37(2.6,16) B38(6,16) B39(2.6,15.5) B40(6,15.5) B41(2.6,15) B42(6,15) B43(2.6,14.5) B44(6,14.5) B45(2.6,14) B46(6,14) B47(2.6,13.5) B48(6,13.5) B49(2.6,13) B50(6,13) B51(2.6,12.5) B52(6,12.5) B53(2.6,12) B54(6,12) B55(2.6,11.5) B56(6,11.5) B57(2.6,11) B58(6,11) B59(2.6,10.5) B60(6,10.5) C1(60,52.5) C2(63.4,52.5) C3(60,52) C4(63.4,52) C5(60,51.5) C6(63.4,51.5) C7(60,51) C8(63.4,51) C9(60,50.5) C10(63.4,50.5) C11(60,50) C12(63.4,50) C13(60,49.5) C14(63.4,49.5) C15(60,49) C16(63.4,49) C17(60,48.5) C18(63.4,48.5) C19(60,48) C20(63.4,48) C21(60,47.5) C22(63.4,47.5) C23(60,47) C24(63.4,47) C25(60,46.5) C26(63.4,46.5) C27(60,46) C28(63.4,46) C29(60,45.5) C30(63.4,45.5) C31(60,45) C32(63.4,45) C33(60,44.5) C34(63.4,44.5) C35(60,44) C36(63.4,44) C37(60,43.5) C38(63.4,43.5) C39(60,43) C40(63.4,43) C41(60,42.5) C42(63.4,42.5) C43(60,42) C44(63.4,42) C45(60,41.5) C46(63.4,41.5) C47(60,41) C48(63.4,41) C49(60,40.5) C50(63.4,40.5) C51(60,40) C52(63.4,40) C53(60,39.5) C54(63.4,39.5) C55(60,39) C56(63.4,39) C57(60,38.5) C58(63.4,38.5) C59(60,38) C60(63.4,38) D1(60,22) D2(63.4,22) D3(60,21.5) D4(63.4,21.5) D5(60,21) D6(63.4,21) D7(60,20.5) D8(63.4,20.5) D9(60,20) D10(63.4,20) D11(60,19.5) D12(63.4,19.5) D13(60,19) D14(63.4,19) D15(60,18.5) D16(63.4,18.5) D17(60,18) D18(63.4,18) D19(60,17.5) D20(63.4,17.5) D21(60,17) D22(63.4,17) D23(60,16.5) D24(63.4,16.5) D25(60,16) D26(63.4,16) D27(60,15.5) D28(63.4,15.5) D29(60,15) D30(63.4,15) D31(60,14.5) D32(63.4,14.5) D33(60,14) D34(63.4,14) D35(60,13.5) D36(63.4,13.5) D37(60,13) D38(63.4,13) D39(60,12.5) D40(63.4,12.5) D41(60,12) D42(63.4,12) D43(60,11.5) D44(63.4,11.5) D45(60,11) D46(63.4,11) D47(60,10.5) D48(63.4,10.5) D49(60,10) D50(63.4,10) D51(60,9.5) D52(63.4,9.5) D53(60,9) D54(63.4,9) D55(60,8.5) D56(63.4,8.5) D57(60,8) D58(63.4,8) D59(60,7.5) D60(63.4,7.5)
  round 6 hole 3.65: MT7(63,3) MT8(3,3) MT9(3,57) MT10(63,57)
  round 6 on Top Paste: ""(3,57) ""(3,3) ""(63,57) ""(63,3)
  Keep-Out Layer circle w0.15: c60.2,23.05 r0.3
  Keep-Out Layer circle w0.15: c60.2,6.45 r0.3
  Keep-Out Layer circle w0.15: c60.2,53.55 r0.3
  Keep-Out Layer circle w0.15: c60.2,36.95 r0.3
  Keep-Out Layer circle w0.15: c2.8,26.05 r0.3
  Keep-Out Layer circle w0.15: c2.8,9.45 r0.3
  Keep-Out Layer circle w0.15: c2.8,50.55 r0.3
  Keep-Out Layer circle w0.15: c2.8,33.95 r0.3
  silkscreen extent 0,0 66,60
IND-4.7UH-1A [mm]
  rect 3.2x1 smd: 1(0,0) 2(0,2.2)
  silkscreen extent -1.8,-0.73 1.8,2.9
IND_10X10 [mm]
  rect 4x2 smd: 1(0,4.5) 2(0,-4.5)
  silkscreen extent -5,-5 5,5
LED-3MM [mm]
  round 1.2 hole 0.7: 1(2.5,0) 2(0,0)
  silkscreen extent -0.75,-0.8 3.25,5
LFCSP32 [mm]
  rect 0.6x0.3 smd: 1(-2.5,1.75) 2(-2.5,1.25) 3(-2.5,0.75) 4(-2.5,0.25) 5(-2.5,-0.25) 6(-2.5,-0.75) 7(-2.5,-1.25) 8(-2.5,-1.75) 17(2.5,-1.75) 18(2.5,-1.25) 19(2.5,-0.75) 20(2.5,-0.25) 21(2.5,0.25) 22(2.5,0.75) 23(2.5,1.25) 24(2.5,1.75)
  rect 0.3x0.6 smd: 9(-1.75,-2.5) 10(-1.25,-2.5) 11(-0.75,-2.5) 12(-0.25,-2.5) 13(0.25,-2.5) 14(0.75,-2.5) 15(1.25,-2.5) 16(1.75,-2.5) 25(1.75,2.5) 26(1.25,2.5) 27(0.75,2.5) 28(0.25,2.5) 29(-0.25,2.5) 30(-0.75,2.5) 31(-1.25,2.5) 32(-1.75,2.5)
  rect 3.1x3.1 smd: ""(0,0)
  silkscreen extent -3.52,-2.5 2.5,2.5
MINIUSB-TYPEAB [mm]
  rect 0.5x2.5 smd: 1(1.6,0) 2(0.8,0) 3(0,0) 4(-0.8,0) 5(-1.6,0)
  rect 2x2.5 smd: 6(-4.4,5.5) 7(-4.4,0) 8(4.4,0) 9(4.4,5.5)
  Keep-Out Layer circle w0.152: c2.2,2.6 r0.45
  Keep-Out Layer circle w0.152: c-2.2,2.6 r0.45
  silkscreen extent -5.7,-1.5 5.7,7.1
MOSFET [mil]
  rect 36x36 smd: 1(0,0) 2(75,0)
  rect 36x50 smd: 3(38,80)
  silkscreen extent -20,-5 95,85
NPN [mil]
  rect 36x50 smd: 1(38,80)
  rect 36x36 smd: 2(0,0) 3(75,0)
  silkscreen extent -20,-5 95,85
PSO8 [mm]
  rect 0.6x1.9 smd: 1(0,0) 2(1.27,0) 3(2.54,0) 4(3.81,0) 5(3.81,5.56) 6(2.54,5.56) 7(1.27,5.56) 8(0,5.56)
  rect 3x2.4 smd: 9(1.9,2.78)
  silkscreen extent -1.1,-0.11 4.4,4.7
QFN48 [mil]
  rrect0% 8x38 smd: 1(0,0) 2(15.74,0) 3(31.49,0) 4(47.24,0) 5(62.99,0) 6(78.74,0) 7(94.48,0) 8(110.23,0) 9(125.98,0) 10(141.73,0) 11(157.48,0) 12(173.22,0) 25(173.22,239.18) 26(157.48,239.18) 27(141.73,239.18) 28(125.98,239.18) 29(110.23,239.18) 30(94.48,239.18) 31(78.74,239.18) 32(62.99,239.18) 33(47.24,239.18) 34(31.49,239.18) 35(15.74,239.18) 36(0,239.18)
  rrect0% 38x8 smd: 13(206.2,32.98) 14(206.2,48.72) 15(206.2,64.47) 16(206.2,80.22) 17(206.2,95.97) 18(206.2,111.72) 19(206.2,127.46) 20(206.2,143.21) 21(206.2,158.96) 22(206.2,174.71) 23(206.2,190.46) 24(206.2,206.2) 37(-32.98,206.2) 38(-32.98,190.46) 39(-32.98,174.71) 40(-32.98,158.96) 41(-32.98,143.21) 42(-32.98,127.46) 43(-32.98,111.72) 44(-32.98,95.97) 45(-32.98,80.22) 46(-32.98,64.47) 47(-32.98,48.72) 48(-32.98,32.98)
  rect 150x150 smd: 49(86.61,119.59)
  silkscreen extent -39,-51 212,245
SC70 [mil]
  rect 16x32 smd: 1(0,0) 2(25.6,0) 3(51.2,0) 4(51.2,85) 5(0,85)
  silkscreen extent -25,9 76,76
SI-51005-F [mil]
  rect 60x60 hole 39.37: 1(0,250)
  round 60 hole 39.37: 2(-50,350) 3(-100,250) 4(-150,350) 5(-200,250) 6(-250,350) 7(-300,250) 8(-350,350) 9(-400,250) 10(-450,350)
  round 65 hole 40: 11(-440.16,540.16) 12(-340.16,540.16) 13(-109.84,540.16) 14(-9.84,540.16)
  round 84 hole 63: SH1(-529.92,120.08) SH2(79.92,120.08)
  round 118.11 hole 129.92 unplated: ""(-450,0) ""(0,0)
  silkscreen extent -543,-425 93,575
SMC [mil]
  rect 99x130 smd: 1(0,0) 2(-267.72,0)
  silkscreen extent -280,-129 12,129
so8 [mm] "Small Outline; 8 Leads; Body Width 3.9 mm; Pitch 1.27 mm"
  rect 0.6x2.2 smd: 1(-1.905,-2.6) 2(-0.635,-2.6) 3(0.635,-2.6) 4(1.905,-2.6) 5(1.905,2.6) 6(0.635,2.6) 7(-0.635,2.6) 8(-1.905,2.6)
  silkscreen extent -2.88,-2.72 2.5,1.1
SO8 [mm] "Small Outline; 8 Leads; Body Width 3.9 mm; Pitch 1.27 mm"
  rect 0.6x2.2 smd: 1(-1.905,-2.6) 2(-0.635,-2.6) 3(0.635,-2.6) 4(1.905,-2.6) 5(1.905,2.6) 6(0.635,2.6) 7(-0.635,2.6) 8(-1.905,2.6)
  silkscreen extent -2.88,-2.72 2.5,1.1
SO-16 [mil] "Small Outline; 16 Leads; Body Width 5.6 mm; Pitch 1.27 mm"
  oval 24x80 smd: 1(0,0) 2(50,0) 3(100,0) 4(150,0) 5(200,0) 6(250,0) 7(300,0) 8(350,0) 9(350,220) 10(300,220) 11(250,220) 12(200,220) 13(150,220) 14(100,220) 15(50,220) 16(0,220)
  silkscreen extent -25,60 375,160
SOT23-5 [mm]
  rect 0.5x1 smd: 1(0,0) 2(1,0) 3(2,0) 4(2,3) 5(0,3)
  silkscreen extent -0.7,0.6 2.7,2.4
SOT753 [mm]
  rect 1x0.6 smd: 1(0,0)
  oval 1x0.6 smd: 2(0,-0.95) 3(0,-1.9) 4(3,-1.9) 5(3,0)
  silkscreen extent 0,-2.5 3,0.6
TLP127 [mm]
  rect 0.8x1.2 smd: 1(-1.27,-3.5) 2(1.27,-3.5) 3(1.27,3.5) 4(-1.27,3.5)
  silkscreen extent -1.8,-2.5 1.8,2.5
UQFN8 [mm]
  rect 0.55x0.25 smd: 1(-0.675,0.5) 3(-0.675,-0.5) 5(0.675,-0.5) 7(0.675,0.5)
  rect 0.55x0.2 smd: 2(-0.675,0) 6(0.675,0)
  rect 0.3x0.6 smd: 4(0,-0.65) 8(0,0.65)
  silkscreen extent -1.92,-1.2 1.2,1.2
USB-HOST [mm]
  round 1.4 hole 0.9: 1(-7,0) 2(-4.5,0) 3(-2.5,0) 4(0,0)
  round 3.3 hole 2.3: 5(-10,-2.7) 6(3,-2.7)
  silkscreen extent -10,-13 3,1
VSSOP10 [mm]
  rect 0.3x1.45 smd: 1(-1,-2.2) 2(-0.5,-2.2) 3(0,-2.2) 4(0.5,-2.2) 5(1,-2.2) 6(1,2.2) 7(0.5,2.2) 8(0,2.2) 9(-0.5,2.2) 10(-1,2.2)
  silkscreen extent -1.5,-1.5 1.5,1.5
XTAL4_SX_3225 [mil]
  rect 51x43 smd: 1(0,0) 2(90.56,0) 3(90.56,74.8) 4(0,74.8)
  silkscreen extent -37,-66 128,109